# Altium PCB PCB1.PcbDoc (part 1 of 2)
Units mm, origin at the board's own origin, x right, y up, seen from the top; angles counter-clockwise.
Board outline 130 x 90 mm, 4 copper layers (Top Layer, GND, PWR, Bottom Layer), stack 1.506 mm thick; 78 components, 53 nets, 257 pads, 35 vias.
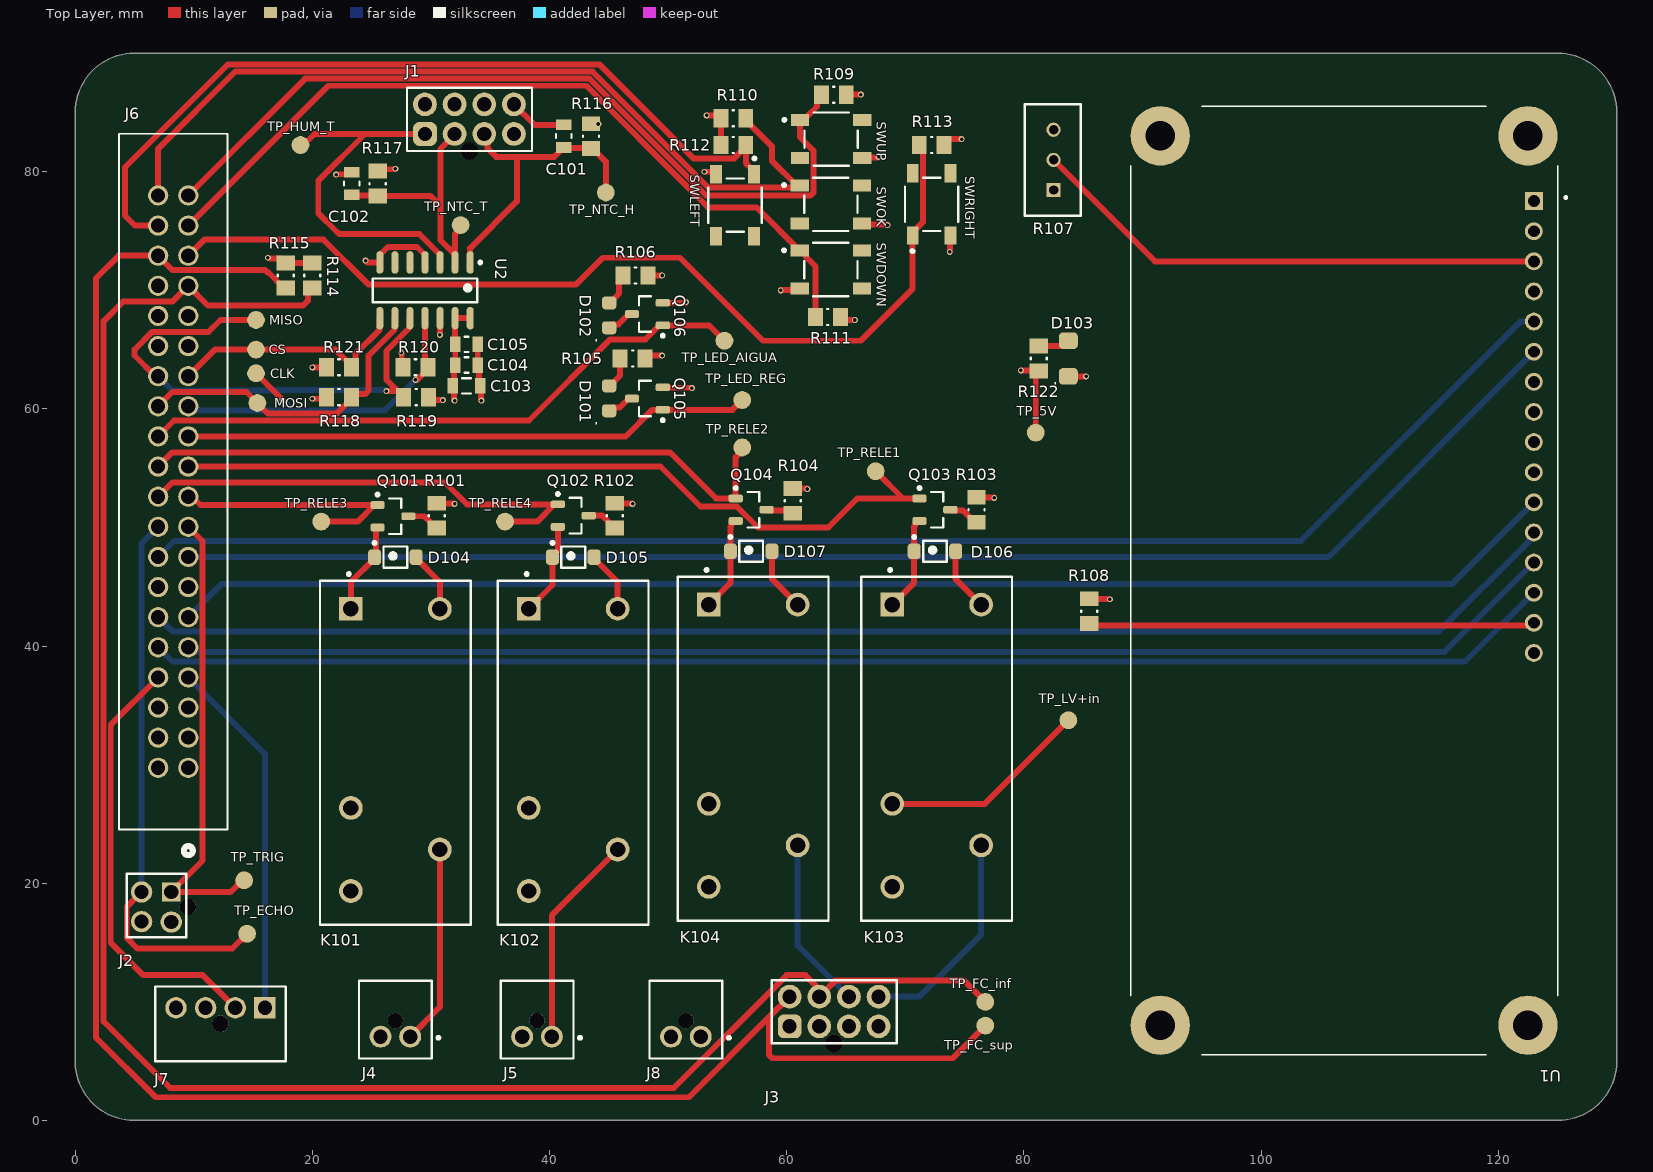
[diagram p0: Top Layer view]
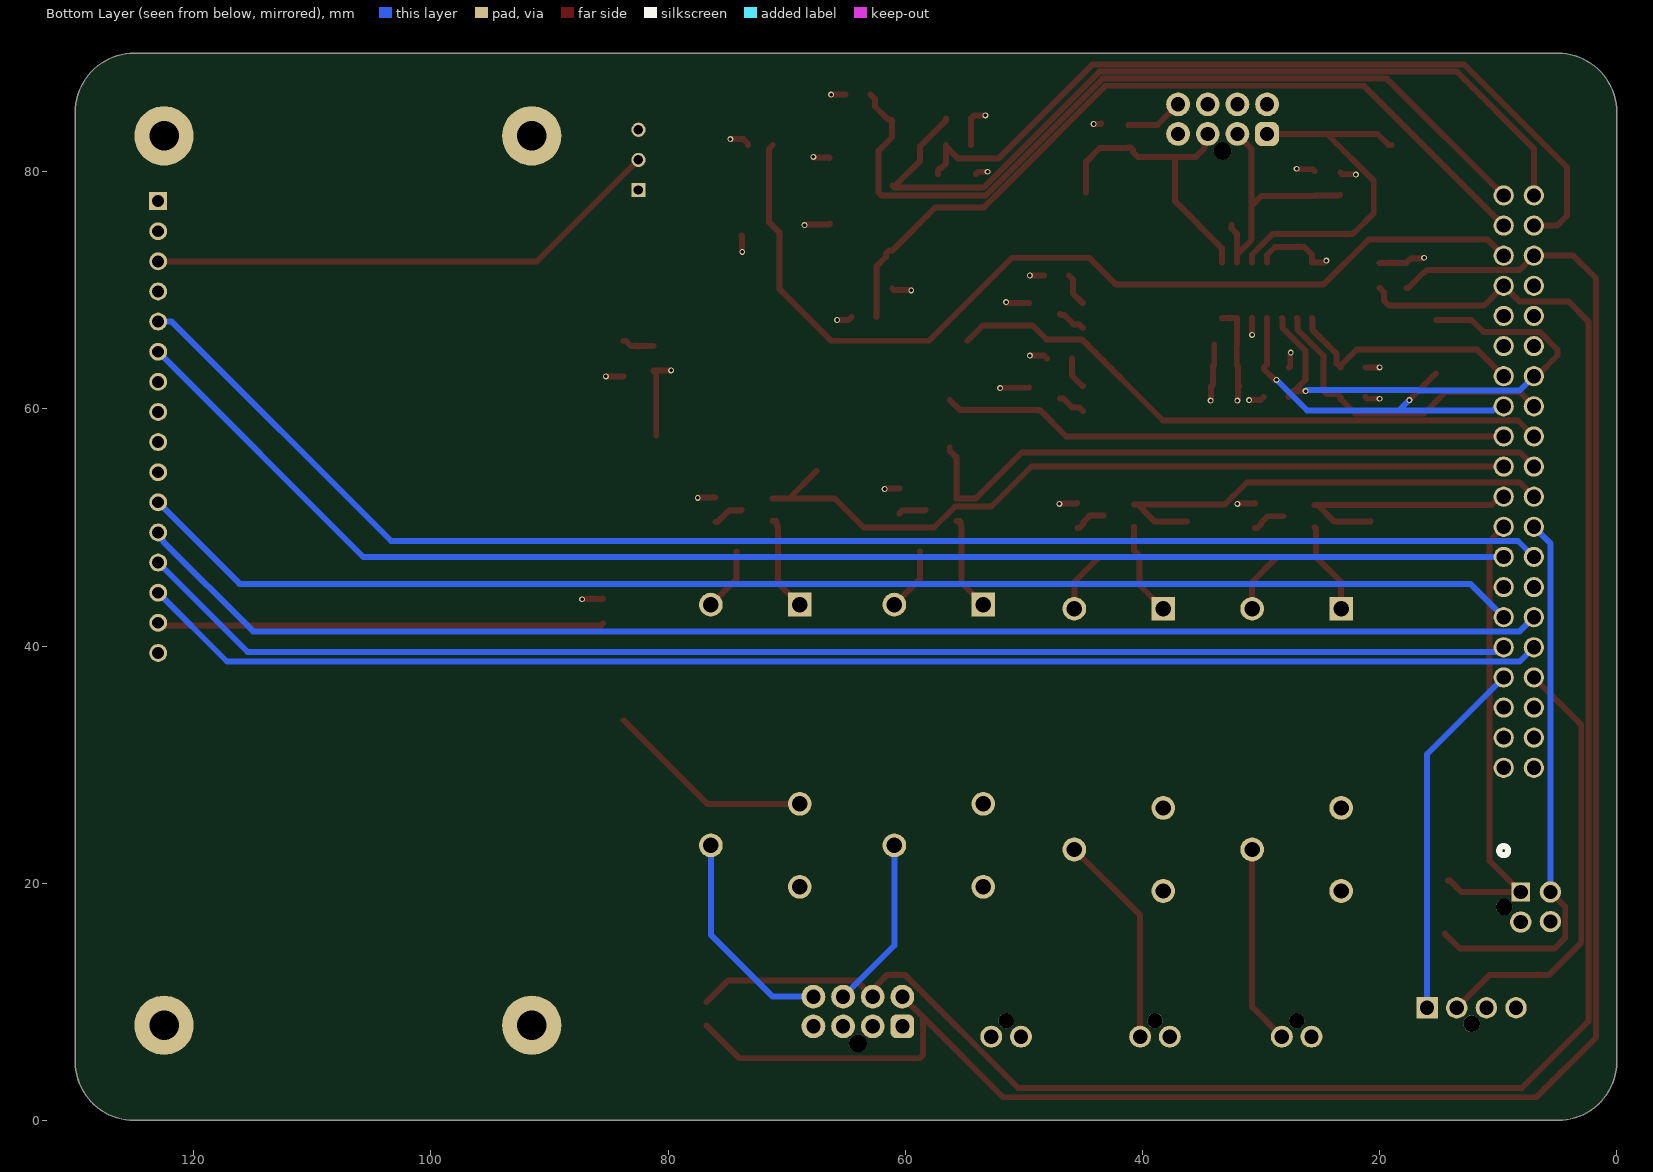
[diagram p1: Bottom Layer view, seen from below]
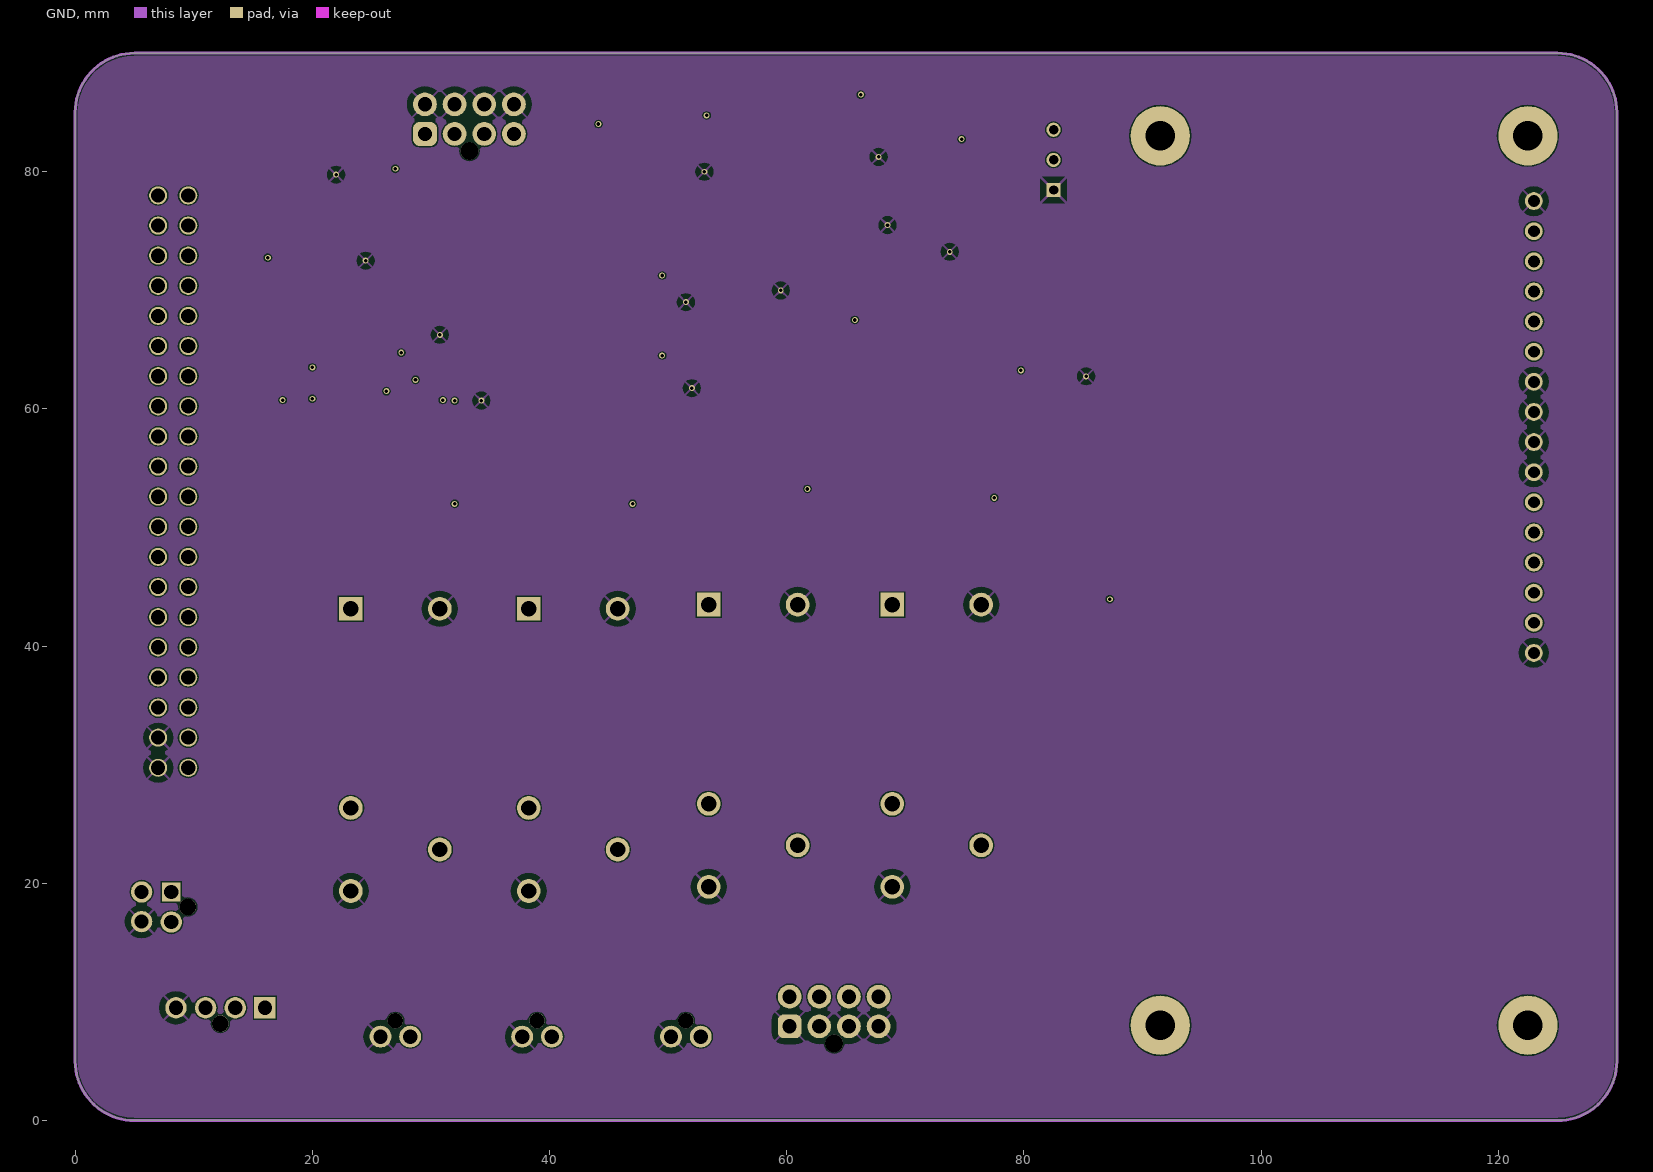
[diagram p2: GND]
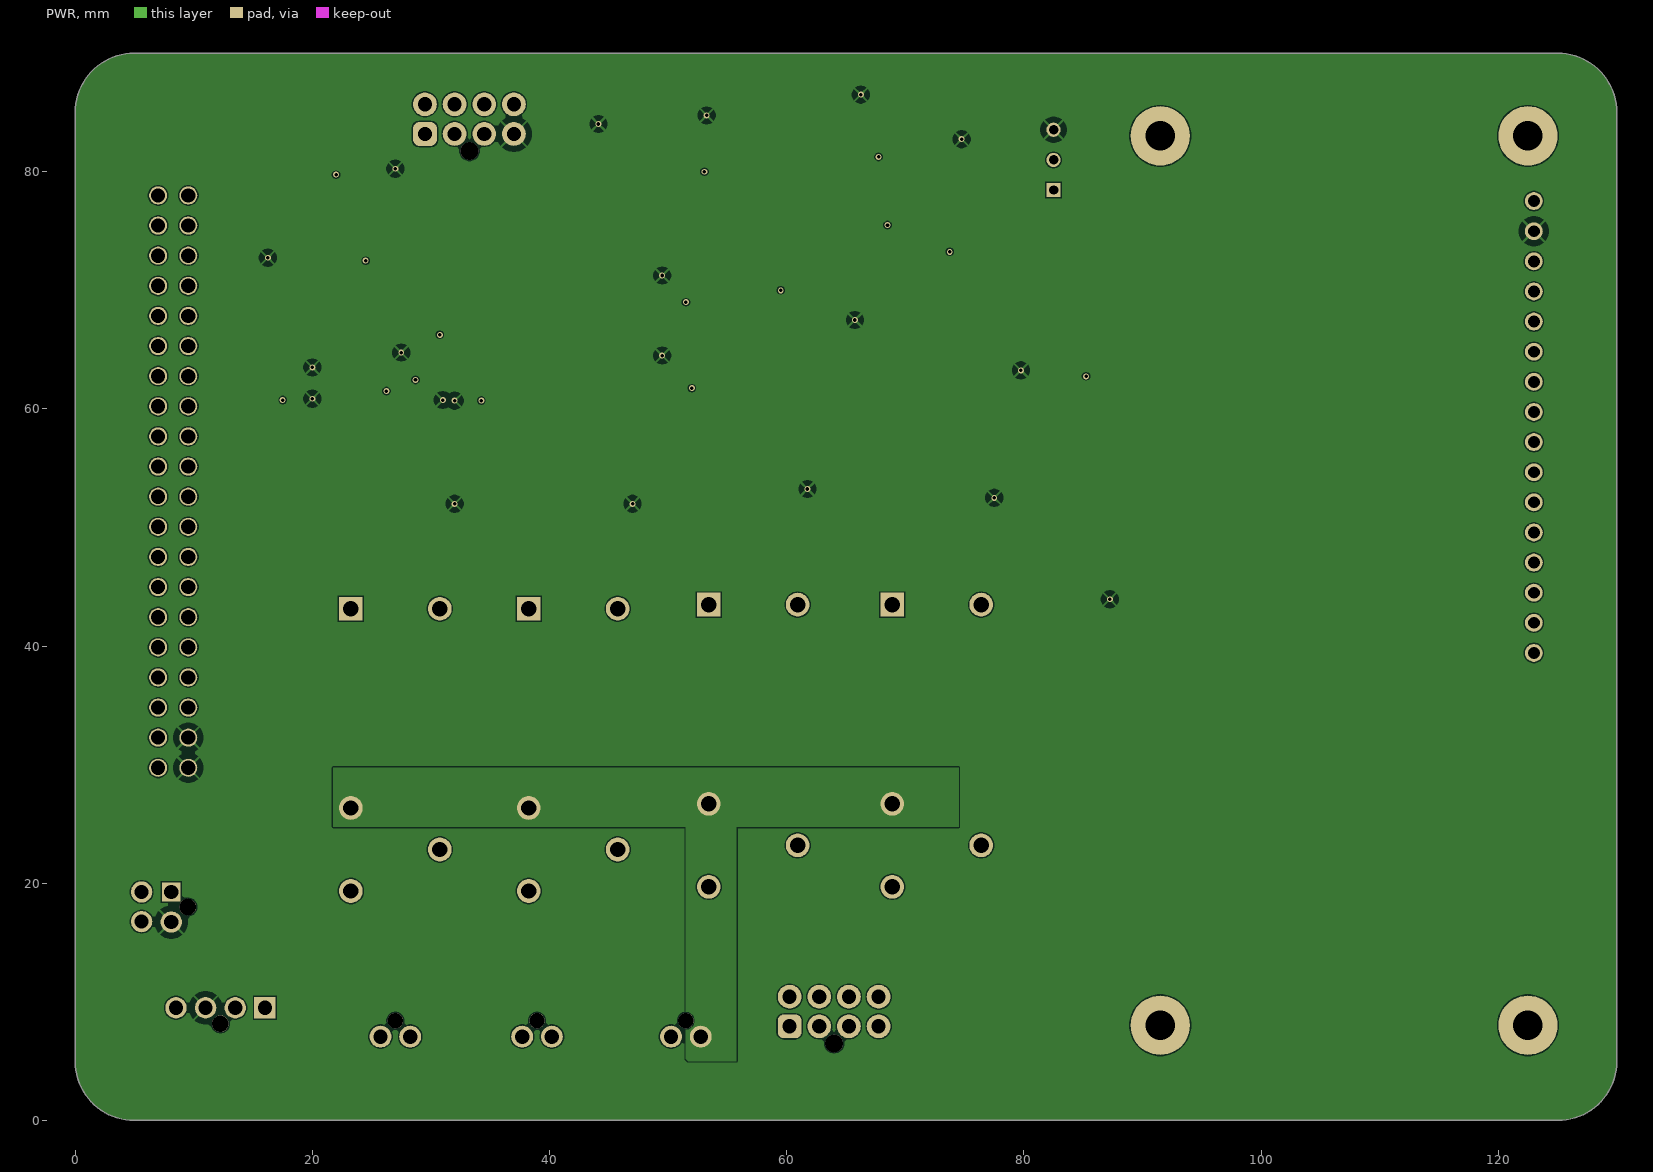
[diagram p3: PWR]
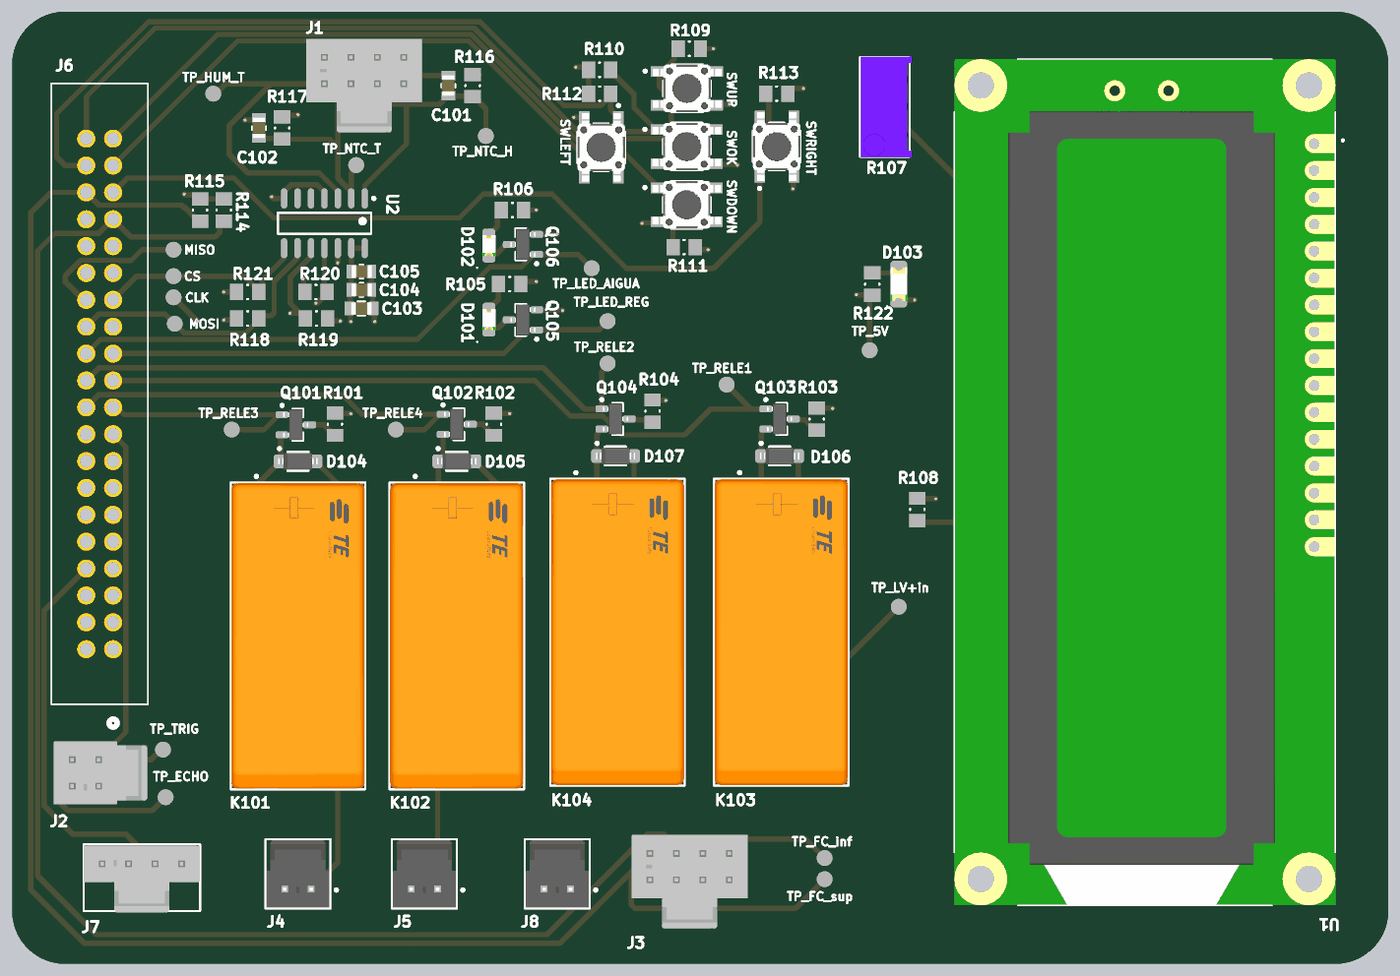
[diagram p4: 3D render of the assembled board from above, using the file's embedded part models]

## Layer stack, top to bottom
Top Solder: solder mask 0.01, Solder Resist, Dk 3.5
Top Layer: signal copper 0.035
Dielectric 2: prepreg 0.1, PP-006, Dk 4.1
GND: signal copper 0.018
Dielectric 4: prepreg 0.1, PP-006, Dk 4.1
Dielectric 1: dielectric 1, FR-4, Dk 4.8
Dielectric 5: prepreg 0.1, PP-006, Dk 4.1
PWR: signal copper 0.018
Dielectric 3: prepreg 0.1, PP-006, Dk 4.1
Bottom Layer: signal copper 0.035
Bottom Solder: solder mask 0.01, Solder Resist, Dk 3.5

## Board outline
0,5 0,85 cw(c5,85) 5,90 125,90 cw(c125,85) 130,85 130,5 cw(c125,5) 125,0 5,0 cw(c5,5)

## Design rules (kind name [scope] priority, off if disabled: settings)
AssemblyTestPointUsage [All] p1 off:
AssemblyTestpoint [All] p1 off: testpointundercomponent=TRUE minsize=1.016 maxsize=2.54 preferedsize=1.524 minholesize=0 maxholesize=1.016 preferedholesize=0.813 testpointgrid=0.025 usegrid=TRUE gridtolerance=0 allowsidetop=TRUE allowsidebottom=TRUE
Clearance [All] p1: gap=0.1 ignorepadtopadclearanceinfootprint=FALSE
ComponentClearance [All] p1: gap=0.2 collisioncheckmode=3 verticalgap=0.2 showdistances=FALSE
FabricationTestPointUsage [All] p1 off: valid=0 allowmultiple=FALSE
FabricationTestpoint [All] p1 off: side=3 testpointundercomponent=TRUE minsize=1.016 maxsize=2.54 preferedsize=1.524 minholesize=0 maxholesize=1.016 preferedholesize=0.813 testpointgrid=0.025 allowsidetop=TRUE allowsidebottom=TRUE usegrid=TRUE gridtolerance=0
HoleSize [All] p1: absolutevalues=TRUE maxlimit=5 minlimit=0.15 maxpercent=80.000 minpercent=20.000
PlaneClearance [All] p1: clearance=0.5
PlaneConnect [All] p1: planeconnectstyle=Relief reliefexpansion=0.5 reliefentries=4 reliefconductorwidth=0.2 reliefairgap=0.5
PolygonConnect [All] p1: connectstyle=Relief reliefconductorwidth=0.2 reliefentries=4 polygonreliefangle="45 Angle" airgapwidth=0.5
RoutingCorners [All] p1: cornerstyle=45-Degree minsetback=2.5 maxsetback=2.5
RoutingVias [All] p1: holewidth=0.3 width=0.7 viastyle="Through Hole" minholewidth=0.2 minwidth=0.5 maxholewidth=5 maxwidth=8
SolderMaskExpansion [All] p1: expansion=0.102 istentingtop=TRUE
SupplyNets "Schematic Supply Nets_2" [InNet('GND')] p1: voltage=0.000
SupplyNets "Schematic Supply Nets_1" [InNet('+5')] p2: voltage=0.000
SupplyNets "Schematic Supply Nets" [InNet('LV+in')] p3: voltage=0.000
UnRoutedNet [All] p1: checkbadconnections=TRUE
Width [All] p1: maxlimit=5 minlimit=0.2 preferedwidth=0.5 midlayer1_minwidth=0.254 midlayer2_minwidth=0.254 minimp=50.000000 maximp=50.000000 favimp=50.000000
20 further rules are at their usual default settings.

## Components (designator, comment, footprint, x,y, rotation, side; value= is the part's Value field where it differs from the comment)
C101 "C100n" C0805FNPC-R 41.2,83 r270 top value=100nF
C102 "C100n" C0805FNPC-R 23.324,79 r270 top value=100nF
C103 "C100p" C0805FNPC-W 33,61.95 r180 top value=100pF
C104 "C100n" C0805FNPC-R 33,63.7 r180 top value=100nF
C105 "C1u" C0805FNPC-R 33,65.45 r180 top value=1µF
CLK "TestPoint" TestPoint 15.25,63 r90 top
CS "TestPoint" TestPoint 15.25,65 r0 top
D101 "LEDYS-0805-120" LED_0805_WE 45.033,60.89 r90 top
D102 "LEDRS-0805-150" LED_0805_WE 45.033,67.89 r90 top
D103 "LEDGS-1206-450" LED_1206_WE 83.75,64.25 r90 top
D104 "DSC-0.5/30-SOD123" DSC-SOD123 27,47.5 r0 top
D105 "DSC-0.5/30-SOD123" DSC-SOD123 42,47.5 r0 top
D106 "DSC-0.5/30-SOD123" DSC-SOD123 72.5,48 r0 top
D107 "DSC-0.5/30-SOD123" DSC-SOD123 57,48 r0 top
J1 "J_NanoFit_2x4_V" J_NanoFit_2x4_V 33.246,83.719 r180 top
J2 "Molex_NanoFit_2x2" J_NanoFit_2x2_V 7.551,18 r270 top
J3 "J_NanoFit_2x4_V" J_NanoFit_2x4_V 63.996,8.468 r180 top
J4 "J_NanoFit_1x2" FP-105309-1102-MFG 27,8.5 r180 top
J5 "J_NanoFit_1x2" FP-105309-1102-MFG 38.947,8.5 r180 top
J6 "70246-4001" CONN_7024640xx_MOL 9.54,29.74 r90 top
J7 "J_NanoFit_1x4_V" J_NanoFit_1x4_V 12.25,9.5 r0 top
J8 "J_NanoFit_1x2" FP-105309-1102-MFG 51.5,8.5 r180 top
K101 "Relay_RZ01-1C4-D005" FP-1415899-7-MFG 27,31 r270 top
K102 "Relay_RZ01-1C4-D005" FP-1415899-7-MFG 42,31 r270 top
K103 "Relay_RZ01-1C4-D005" FP-1415899-7-MFG 72.65,31.35 r270 top
K104 "Relay_RZ01-1C4-D005" FP-1415899-7-MFG 57.175,31.35 r270 top
MISO "TestPoint" TestPoint 15.25,67.5 r90 top
MOSI "TestPoint" TestPoint 15.364,60.5 r90 top
Q101 "TRT-NPN" TRT-NPN-0.5/45-SOT23 26.8,50.95 r0 top
Q102 "TRT-NPN" TRT-NPN-0.5/45-SOT23 42,51 r0 top
Q103 "TRT-NPN" TRT-NPN-0.5/45-SOT23 72.5,51.5 r0 top
Q104 "TRT-NPN" TRT-NPN-0.5/45-SOT23 57,51.5 r0 top
Q105 "TRT-NPN" TRT-NPN-0.5/45-SOT23 48.25,60.875 r180 top
Q106 "TRT-NPN" TRT-NPN-0.5/45-SOT23 48.25,68 r180 top
R101 "R1K" 0805 30.5,51 r0 top value=1k
R102 "R1K" 0805 45.5,51 r0 top value=1k
R103 "R1K" 0805 76,51.5 r0 top value=1k
R104 "R1K" 0805 60.5,52.25 r0 top value=1k
R105 "R1K" 0805 47,64.25 r270 top value=1k
R106 "R1K" 0805 47.25,71.25 r270 top value=1k
R107 "R10k-VTR" R10k-VTR 82.5,81 r180 top value=10k
R108 "R1K" 0805 85.5,42.95 r0 top value=1k
R109 "R4K7" 0805 63.975,86.5 r270 top value=1k
R110 "R4K7" 0805 55.5,84.5 r90 top value=1k
R111 "R4K7" 0805 63.475,67.75 r270 top value=1k
R112 "R4K7" 0805 55.5,82.25 r90 top value=1k
R113 "R4K7" 0805 72.225,82.25 r270 top value=1k
R114 "R4K7" 0805 20,71.25 r0 top value=1k
R115 "R4K7" 0805 17.75,71.25 r0 top value=1k
R116 "R10K" 0805 43.5,83 r0 top value=1k
R117 "R10K" 0805 25.5,79 r0 top value=1k
R118 "R10K" 0805 22.25,61 r90 top value=1k
R119 "R10K" 0805 28.75,61 r270 top value=1k
R120 "R10K" 0805 28.7,63.5 r270 top value=1k
R121 "R10K" 0805 22.25,63.5 r270 top value=1k
R122 "R1K" 0805 81.25,64.25 r180 top value=1k
SWDOWN "tact_switch" FP-PTS647SK38SMTR2LFS-MFG 63.725,71.75 r0 top
SWLEFT "tact_switch" FP-PTS647SK38SMTR2LFS-MFG 55.65,77.175 r270 top
SWOK "tact_switch" FP-PTS647SK38SMTR2LFS-MFG 63.725,77.25 r0 top
SWRIGHT "tact_switch" FP-PTS647SK38SMTR2LFS-MFG 72.225,77.25 r90 top
SWUP "tact_switch" FP-PTS647SK38SMTR2LFS-MFG 63.75,82.75 r0 top
TP_5V "TestPoint" TestPoint 81,58 r90 top
TP_ECHO "TestPoint" TestPoint 14.5,15.75 r90 top
TP_FC_inf "TestPoint" TestPoint 76.75,10 r90 top
TP_FC_sup "TestPoint" TestPoint 76.75,8 r90 top
TP_HUM_T "TestPoint" TestPoint 19,82.25 r90 top
TP_LED_AIGUA "TestPoint" TestPoint 54.75,65.75 r90 top
TP_LED_REG "TestPoint" TestPoint 56.25,60.75 r90 top
TP_LV+in "TestPoint" TestPoint 83.75,33.75 r90 top
TP_NTC_H "TestPoint" TestPoint 44.75,78.25 r90 top
TP_NTC_T "TestPoint" TestPoint 32.5,75.5 r90 top
TP_RELE1 "TestPoint" TestPoint 67.5,54.75 r90 top
TP_RELE2 "TestPoint" TestPoint 56.25,56.75 r90 top
TP_RELE3 "TestPoint" TestPoint 20.75,50.5 r90 top
TP_RELE4 "TestPoint" TestPoint 36.25,50.5 r90 top
TP_TRIG "TestPoint" TestPoint 14.25,20.25 r90 top
U1 "LCD2X16" LCD_LCD2X16 107,45.525 r270 top
U2 "MCP3302-CI/SL" SOIC-SL14_L 29.5,70 r270 top

## Footprints (in the part's own frame and the unit in brackets; to place one, negate y for a bottom-side part, rotate by r counter-clockwise, add the part's x,y. Pads: shape width x height; smd on the part's side, far side on the other; paste and mask are expansions set on the pad)
0805 [mm] "Chip Resistor, 2-Leads, Body 2,60x1,50mm, IPC Medium Density"
  rect 1.55x1.25 smd: 1(0,-1.05) 2(0,1.05)
  silkscreen extent -0.67,-0.05 0.67,0.05, body extent -0.75,-1.3 0.75,1.3, height 0.6
C0805FNPC-R [mm]
  rect 0.9x1.3 smd: 1(-0.95,0) 2(0.95,0)
  silkscreen extent -0.15,-0.65 0.15,0.65, body extent -1.03,-0.63 0.97,0.63, height 0.96
C0805FNPC-W [mm]
  rect 0.9x1.3 smd: 1(-1.15,0) 2(1.15,0)
  silkscreen extent -0.35,-0.65 0.35,0.65, body extent -1,-0.63 1,0.63, height 0.96
CONN_7024640xx_MOL [mil]
  round 67 / inner round 60 / far side round 67 hole 47 mask+0: 1(0,0) 2(100,0) 3(200,0) 4(300,0) 5(400,0) 6(500,0) 7(600,0) 8(700,0) 9(800,0) 10(900,0) 11(1000,0) 12(1100,0) 13(1200,0) 14(1300,0) 15(1400,0) 16(1500,0) 17(1600,0) 18(1700,0) 19(1800,0) 20(1900,0) 21(0,100) 22(100,100) 23(200,100) 24(300,100) 25(400,100) 26(500,100) 27(600,100) 28(700,100) 29(800,100) 30(900,100) 31(1000,100) 32(1100,100) 33(1200,100) 34(1300,100) 35(1400,100) 36(1500,100) 37(1600,100) 38(1700,100) 39(1800,100) 40(1900,100)
  silkscreen extent -290,-130 2105,230
DSC-SOD123 [mm] "SOIC, 2-Leads, Body 1,60x2,69mm, Pitch 1,27mm, IPC Low Density"
  rrect50% 1.1x1.3 smd: A(1.75,0) K(-1.75,0)
  silkscreen extent -1.87,-0.9 1,1.32, body extent -1.86,-0.8 1.86,0.8, height 1.36
FP-105309-1102-MFG [mm]
  round 1.85 hole 1.2 mask+0: 1(-1.25,1.43) 2(1.25,1.43)
  round 1.3 hole 1.3 unplated mask+0: ""(0,0.09)
  silkscreen extent -3.75,-3.27 3.07,3.27, body extent -3.17,-3.37 3.17,3.37, height 0.25
FP-1415899-7-MFG [mm]
  round 2 hole 1.3 mask+0: 11(8.15,3.75) 12(4.65,-3.75) 14(11.65,-3.75) A2(-12.15,3.75)
  rect 2x2 hole 1.3 mask+0: A1(-12.15,-3.75)
  silkscreen extent -15.2,-6.35 14.5,6.35, body extent -14.6,-6.45 14.6,6.45, height 0.25
FP-PTS647SK38SMTR2LFS-MFG [mm]
  rect 1.55x1 smd mask+0: 1(-2.625,1.6) 2(2.625,1.6) 3(-2.625,-1.6) 4(2.625,-1.6)
  silkscreen extent -4.07,-2.25 2.25,2.25, body extent -3.5,-2.35 3.5,2.35, height 0.25
J_NanoFit_1x4_V [mm]
  round 1.4 hole 1.4: 0(0,-1.34)
  rect 1.8x1.8 hole 1.2: 1(3.75,0)
  round 1.8 hole 1.2: 2(1.25,0) 3(-1.25,0) 4(-3.75,0)
  silkscreen extent -5.5,-4.5 5.5,1.8, body extent -5.47,-4.65 5.47,1.69, height 10.68
J_NanoFit_2x2_V [mm]
  round 1.8 hole 1.2: 1(1.27,0.552) 2(1.23,-1.949) 4(-1.27,-1.949)
  rect 1.6x1.6 hole 1.2: 3(-1.27,0.552)
  round 1.4 hole 1.4: 5(0,1.949)
  silkscreen extent -2.79,-3.2 2.54,1.8, body extent -3.02,-3.61 2.92,5.23, height 9.92
J_NanoFit_2x4_V [mm]
  rrect50% 2x2 hole 1.2: 1(3.75,0.532)
  round 2 hole 1.2: 2(1.25,0.532) 3(-1.25,0.532) 4(-3.75,0.532) 5(3.75,-1.968) 6(1.25,-1.968) 7(-1.25,-1.968) 8(-3.75,-1.969)
  round 1.5 hole 1.5: 9(-0.004,1.968)
  silkscreen extent -5.27,-3.37 5.27,1.97, body extent -5.47,-3.71 5.47,5.13, height 9.92
LCD_LCD2X16 [mm]
  rect 1.508x1.508 / inner round 1.508 / far side rect 1.508x1.508 hole 1: 1(-32,16)
  round 1.508 hole 1: 2(-29.46,16) 3(-26.92,16) 4(-24.38,16) 5(-21.84,16) 6(-19.3,16) 7(-16.76,16) 8(-14.22,16) 9(-11.68,16) 10(-9.14,16) 11(-6.6,16) 12(-4.06,16) 13(-1.52,16) 14(1.02,16) 15(3.56,16) 16(6.1,16)
  round 5 hole 2.5: S1(-37.5,15.5) S2(37.5,15.5) S3(37.5,-15.5) S4(-37.5,-15.5)
  silkscreen extent -40,-18 40,18.8, body extent -40,-18 40,18, height 7
LED_0805_WE [mm] "SODFL, 2-Leads, Body 1,60x3,20mm, IPC Medium Density"
  rrect50% 1.1x1.2 smd: A(1.05,0) K(-1.05,0)
  silkscreen extent -2.15,1.05 -2.05,1.15, body extent -1,-0.62 1,0.63, height 0.7
LED_1206_WE [mm] "SODFL, 2-Leads, Body 1,60x3,20mm, IPC Medium Density"
  rrect50% 1.4x1.6 smd: A(1.5,0) K(-1.5,0)
  silkscreen extent -2.15,1.05 -2.05,1.15, body extent -1.6,-0.8 1.6,0.8, height 0.68
R10k-VTR [mm]
  rect 1.2x1.2 hole 0.8: 1(0,2.54)
  round 1.2 hole 0.8: 2(0,-2.54) 3(0,0)
  silkscreen extent -2.29,-4.7 2.41,4.7, body extent -2.49,-4.78 2.34,4.78, height 11.09
SOIC-SL14_L [mm] "SOIC, 14-Leads, Body 8.7x3.9mm, Pitch 1.27mm, IPC High Density"
  oval 1.9x0.6 smd: 1(-2.35,3.81) 2(-2.35,2.54) 3(-2.35,1.27) 4(-2.35,0) 5(-2.35,-1.27) 6(-2.35,-2.54) 7(-2.35,-3.81) 8(2.35,-3.81) 9(2.35,-2.54) 10(2.35,-1.27) 11(2.35,0) 12(2.35,1.27) 13(2.35,2.54) 14(2.35,3.81)
  silkscreen extent -2.47,-4.4 1,4.79, body extent -2,-4.38 2,4.38, height 1.75
TestPoint [mm]
  round 1.5 smd: 1(0,0)
TRT-NPN-0.5/45-SOT23 [mm] "SOT23, 3-Leads, Body 2,92x2,37mm, Pitch 0,95mm, IPC Low Density"
  rrect50% 1.2x0.65 smd: B(-1.3,0.95) C(1.3,0) E(-1.3,-0.95)
  silkscreen extent -1.42,-1.5 0.7,1.95, body extent -1.18,-1.46 1.19,1.46, height 1.12

## Part data
C101 C102 C104: library part CMP-00063-3, "Cap, 0.1ΜF, 50V, 10%, X7R, 0805", Case Code (Metric)=2012, Case/Package=0805, Dielectric=X7R, Manufacturer 1="Wurth Electronics", Manufacturer Part Number 1=885012207098, Max Operating Temperature=125°C, Min Operating Temperature=-55°C, Tolerance=10%, Voltage Rating=50V, .Creator=DR, Category="Ceramic Capacitors", ComponentLink1Description=http://www.farnell.com/datasheets/1958498.pdf?src-supplier=Farnell, ComponentLink1URL=http://www.farnell.com/datasheets/1958498.pdf?src-supplier=Farnell, ComponentLink2Description=http://www.farnell.com/datasheets/1958498.pdf?src-supplier=Element14, ComponentLink2URL=http://www.farnell.com/datasheets/1958498.pdf?src-supplier=Element14, ComponentLink3Description=https://katalog.we-online.de/pbs/datasheet/885012207098.pdf?src-supplier=Digi-Key, ComponentLink3URL=https://katalog.we-online.de/pbs/datasheet/885012207098.pdf?src-supplier=Digi-Key, ComponentLink4Description=http://www.farnell.com/datasheets/1958498.pdf?src-supplier=Newark, ComponentLink4URL=http://www.farnell.com/datasheets/1958498.pdf?src-supplier=Newark, Design Item ID=C100n-50V-0805FNPC-X7R, Length=0.079inch, Mount="Surface Mount", Packaging="Cut Tape", Pricing 1="100=0,10200, 500=0,07100, 2000=0,06100 (GBP)", REACH SVHC=Unknown, RoHS=Yes, RoHS Compliant=Yes, Source=Passives.SchLib, Stock 1=8000, Thickness=0.035inch, Voltage Rating (DC)=50V, Width=0.049inch
C103: library part CMP-00068-3, "Multilayer Ceramic Capacitor, Wcap-Csgp Series, 100 Pf, 5%, C0G / Np0, 50 V, 0805 [2012 Metric] Rohs Compliant: Yes", Case Code (Metric)=2012, Case/Package=0805, Dielectric=C0G, Manufacturer="Wurth Electronics", Manufacturer Part Number=885012007057, Max Operating Temperature=125°C, Min Operating Temperature=-55°C, Tolerance=5%, Voltage Rating=50V, .Creator=DR, Category="Ceramic Capacitors", ComponentLink1Description=http://www.farnell.com/datasheets/1958443.pdf?src-supplier=Farnell, ComponentLink1URL=http://www.farnell.com/datasheets/1958443.pdf?src-supplier=Farnell, ComponentLink2Description=https://katalog.we-online.de/pbs/datasheet/885012007057.pdf?src-supplier=Digi-Key, ComponentLink2URL=https://katalog.we-online.de/pbs/datasheet/885012007057.pdf?src-supplier=Digi-Key, ComponentLink3Description=http://www.farnell.com/datasheets/1958443.pdf?src-supplier=Element14, ComponentLink3URL=http://www.farnell.com/datasheets/1958443.pdf?src-supplier=Element14, ComponentLink4Description=http://www.farnell.com/datasheets/1958443.pdf?src-supplier=Newark, ComponentLink4URL=http://www.farnell.com/datasheets/1958443.pdf?src-supplier=Newark, ComponentLink5Description="Where buy it", ComponentLink5URL=https://www.we-online.com/catalog/en/WCAP-CSGP-50VDC#885012007057, Design Item ID=C100p-50V-0805FNPC-C0G/NP0, Length=0.079inch, Mount="Surface Mount", Packaging="Cut Tape", Pricing 1="4000=0,03900, 12000=0,03800 (USD)", REACH SVHC=Unknown, RoHS=Yes, RoHS Compliant=Yes, Source=Passives.SchLib, Stock 1=1, Thickness=0.035inch, Voltage Rating (DC)=50V, Width=0.049inch
C105: library part CMP-00052-2, "Multilayer Ceramic Capacitor, Wcap-Csgp Series, 1 F, 10%, X7R, 50 V, 0805 [2012 Metric] Rohs Compliant: Yes", Case Code (Metric)=2012, Case/Package=0805, Dielectric=X7R, Manufacturer 1="Wurth Electronics", Manufacturer Part Number 1=885012207103, Max Operating Temperature=85°C, Min Operating Temperature=-55°C, Tolerance=10%, Voltage Rating=50V, .Creator=GP, Category="Ceramic Capacitors", ComponentLink1Description=http://www.farnell.com/datasheets/1958501.pdf?src-supplier=Farnell, ComponentLink1URL=http://www.farnell.com/datasheets/1958501.pdf?src-supplier=Farnell, ComponentLink2Description=http://www.farnell.com/datasheets/1958501.pdf?src-supplier=Element14, ComponentLink2URL=http://www.farnell.com/datasheets/1958501.pdf?src-supplier=Element14, ComponentLink3Description=https://katalog.we-online.de/pbs/datasheet/885012107003.pdf?src-supplier=Digi-Key, ComponentLink3URL=https://katalog.we-online.de/pbs/datasheet/885012107003.pdf?src-supplier=Digi-Key, ComponentLink4Description=http://www.farnell.com/datasheets/1958501.pdf?src-supplier=Newark, ComponentLink4URL=http://www.farnell.com/datasheets/1958501.pdf?src-supplier=Newark, Design Item ID=C1u-50V-0805FNPC-X7R, Length=0.079inch, Mount="Surface Mount", Packaging="Cut Tape", Pricing 1="50=0,27200, 250=0,25300, 500=0,22800, 1250=0,20100, 2500=0,17100 (GBP)", REACH SVHC=Unknown, RoHS=Yes, RoHS Compliant=Yes, Source=Passives.SchLib, Stock 1=5100, Thickness=0.053inch, Voltage Rating (DC)=50V, Width=0.049inch
CLK CS MISO MOSI TP_5V TP_ECHO TP_FC_inf TP_FC_sup TP_HUM_T TP_LED_AIGUA TP_LED_REG TP_LV+in TP_NTC_H TP_NTC_T TP_RELE1 TP_RELE2 TP_RELE3 TP_RELE4 TP_TRIG: library part CMP-00042-2, "Test Point 1x1 mm", .Creator=GP, .PCBcheck=GP, .SCHcheck=GP, Category=TestPoint, Design Item ID=TestPoint, Source=e-Tech_Racing.SchLib
D101: library part CMP-00136-1, "2 V Yellow LED 2012 (0805) SMD, Wurth Elektronik WL-SMCW 150080YS75000", Case Code (Imperial)=0805, Case Code (Metric)=2012, Color=Yellow, Forward Current=30mA, Forward Voltage=2V, Manufacturer 1="Wurth Electronics", Manufacturer Part Number 1=150080YS75000, Max Operating Temperature=85°C, Min Operating Temperature=-40°C, Package Quantity=4000, Test Current=20mA, .Creator=DR, Case/Package=0805, Category=LEDs, ComponentLink1Description=Datasheet, ComponentLink1URL=https://www.we-online.com/catalog/datasheet/150080YS75000.pdf, ComponentLink2Description="Where buy it", ComponentLink2URL=https://katalog.we-online.de/en/led/WL-SMCW/150080YS75000, ComponentLink3Description=https://datasheet.ciiva.com/23843/150080ys75000-23843256.pdf?src-supplier=Newark, ComponentLink3URL=https://datasheet.ciiva.com/23843/150080ys75000-23843256.pdf?src-supplier=Newark, ComponentLink4Description=https://datasheet.ciiva.com/29279/759438-da-01-en-chipled-0805-w-kl-gelb-150080ys75000-29279034.pdf?src-supplier=Conrad, ComponentLink4URL=https://datasheet.ciiva.com/29279/759438-da-01-en-chipled-0805-w-kl-gelb-150080ys75000-29279034.pdf?src-supplier=Conrad, ComponentLink5Description=https://datasheet.ciiva.com/22656/1911353-22656971.pdf?src-supplier=Element14, ComponentLink5URL=https://datasheet.ciiva.com/22656/1911353-22656971.pdf?src-supplier=Element14, ComponentLink6Description=https://datasheet.ciiva.com/29563/150080ys75000-29563019.pdf?src-supplier=Digi-Key, ComponentLink6URL=https://datasheet.ciiva.com/29563/150080ys75000-29563019.pdf?src-supplier=Digi-Key, ComponentLink7Description=https://datasheet.ciiva.com/29563/150080ys75000-29563020.pdf?src-supplier=Digi-Key, ComponentLink7URL=https://datasheet.ciiva.com/29563/150080ys75000-29563020.pdf?src-supplier=Digi-Key, ComponentLink8Description=https://datasheet.ciiva.com/29563/150080ys75000-29563021.pdf?src-supplier=Digi-Key, ComponentLink8URL=https://datasheet.ciiva.com/29563/150080ys75000-29563021.pdf?src-supplier=Digi-Key, Design Item ID=LEDYS-0805-120, Dominant Wavelength=590nm, Height=0.7mm, Length=2mm, Lens Style=Clear,Rectangular, Luminous Intensity=120mcd, Mount="Surface Mount", Packaging="Tape and Reel", Pricing 1="50=0,19300, 500=0,12900, 750=0,12300, 1500=0,11700, 3000=0,11100 (USD)", REACH SVHC=Unknown, RoHS=Yes, RoHS Compliant=Yes, Source=Semiconductor.SchLib, Stock 1=2100, Viewing Angle=140°, Wavelength=590nm, Width=1.25mm
D102: library part CMP-00133-1, "0805(H=0.8mm) 红色 高亮 λD=625nm VF=2V IF=30mA PD=72mW", Case Code (Imperial)=0805, Case Code (Metric)=2012, Color=Red, Forward Current=30mA, Forward Voltage=2V, Manufacturer 1="Wurth Electronics", Manufacturer Part Number 1=150080RS75000, Max Operating Temperature=85°C, Min Operating Temperature=-40°C, Package Quantity=4000, Test Current=20mA, .Creator=DR, Case/Package=0805, Category=LEDs, ComponentLink1Description=Datasheet, ComponentLink1URL=https://www.we-online.com/catalog/datasheet/150080RS75000.pdf, ComponentLink2Description="Where buy it", ComponentLink2URL=https://katalog.we-online.de/en/led/WL-SMCW/150080RS75000, ComponentLink3Description=https://datasheet.ciiva.com/22656/150080rs75000-22656961.pdf?src-supplier=Element14, ComponentLink3URL=https://datasheet.ciiva.com/22656/150080rs75000-22656961.pdf?src-supplier=Element14, ComponentLink4Description=https://datasheet.ciiva.com/29279/759435-da-01-en-chipled-0805-w-kl-rot-150080rs75000-29279032.pdf?src-supplier=Conrad, ComponentLink4URL=https://datasheet.ciiva.com/29279/759435-da-01-en-chipled-0805-w-kl-rot-150080rs75000-29279032.pdf?src-supplier=Conrad, Design Item ID=LEDRS-0805-150, Dominant Wavelength=625nm, Height=0.7mm, Length=2mm, Lens Style=Clear,Rectangular, Luminous Intensity=150mcd, Mount="Surface Mount", Packaging="Tape and Reel", Pricing 1="50=0,19300, 500=0,12900, 1000=0,12300, 2000=0,11700, 4000=0,11100 (USD)", REACH SVHC=Unknown, RoHS=Yes, RoHS Compliant=Yes, Source=Semiconductor.SchLib, Stock 1=1, Viewing Angle=140°, Wavelength=625nm, Width=1.25mm
D103: library part CMP-00132-1, "Led, Green, 520 Nm, 3.2 V, 30 Ma, 450 Mcd Rohs Compliant: Yes", Case Code (Imperial)=1206, Case Code (Metric)=3216, Color=Green, Forward Current=30mA, Forward Voltage=3.2V, Manufacturer="Wurth Electronics", Manufacturer Part Number=150120GS75000, Max Operating Temperature=85°C, Min Operating Temperature=-40°C, Package Quantity=3000, Test Current=20mA, .Creator=GP, Case/Package=1206, Category=LEDs, ComponentLink1Description=https://datasheet.ciiva.com/22656/150120gs75000-22656979.pdf?src-supplier=Element14, ComponentLink1URL=https://datasheet.ciiva.com/22656/150120gs75000-22656979.pdf?src-supplier=Element14, ComponentLink2Description=https://datasheet.ciiva.com/29279/759441-da-01-en-chipled-1206-w-kl-gruen-150120gs75000-29279042.pdf?src-supplier=Conrad, ComponentLink2URL=https://datasheet.ciiva.com/29279/759441-da-01-en-chipled-1206-w-kl-gruen-150120gs75000-29279042.pdf?src-supplier=Conrad, ComponentLink3Description=https://datasheet.ciiva.com/48430/150120gs75000-eng-tds-48430053.pdf?src-supplier=Distrelec, ComponentLink3URL=https://datasheet.ciiva.com/48430/150120gs75000-eng-tds-48430053.pdf?src-supplier=Distrelec, ComponentLink4Description=https://datasheet.ciiva.com/29561/150120gs75000-29561883.pdf?src-supplier=Digi-Key, ComponentLink4URL=https://datasheet.ciiva.com/29561/150120gs75000-29561883.pdf?src-supplier=Digi-Key, ComponentLink5Description=https://datasheet.ciiva.com/29561/150120gs75000-29561884.pdf?src-supplier=Digi-Key, ComponentLink5URL=https://datasheet.ciiva.com/29561/150120gs75000-29561884.pdf?src-supplier=Digi-Key, ComponentLink6Description=https://datasheet.ciiva.com/29561/150120gs75000-29561885.pdf?src-supplier=Digi-Key, ComponentLink6URL=https://datasheet.ciiva.com/29561/150120gs75000-29561885.pdf?src-supplier=Digi-Key, ComponentLink7Description="Where buy it", ComponentLink7URL=https://www.we-online.com/catalog/en/WL-SMCW?sq=150120GS75000#150120GS75000, Design Item ID=LEDGS-1206-450, Dominant Wavelength=520nm, Height=0.68mm, Length=3.2mm, Lens Style=Clear,Rectangular, Luminous Intensity=450mcd, Mount="Surface Mount", Packaging="Tape and Reel", Pricing 1="50=0,23200, 500=0,16400, 750=0,15500, 1500=0,15000, 3000=0,14200 (USD)", REACH SVHC=Unknown, RoHS=Yes, RoHS Compliant=Yes, Source=Semiconductor.SchLib, Stock 1=1, Viewing Angle=140°, Wavelength=520nm, Width=1.6mm
D104 D105 D106 D107: library part CMP-00165-2, "VR=30V IF=500mA 30pF P=410mW", Average Rectified Current=500mA, Forward Voltage=430mV, Max Forward Surge Current (Ifsm)=5.5A, Max Repetitive Reverse Voltage (Vrrm)=30V, Max Reverse Current=130uA, Package Quantity=1, .Creator=GP, Category=Diode, ComponentLink1Description=Datasheet, ComponentLink2Description="Where buy it", ComponentLink3Description=https://datasheet.ciiva.com/30479/0900766b810e2512-30479401.pdf?src-supplier=RSComponents, ComponentLink3URL=https://datasheet.ciiva.com/30479/0900766b810e2512-30479401.pdf?src-supplier=RSComponents, ComponentLink4Description=https://datasheet.ciiva.com/34301/974753-34301826.pdf?src-supplier=Jameco, ComponentLink4URL=https://datasheet.ciiva.com/34301/974753-34301826.pdf?src-supplier=Jameco, ComponentLink5Description=https://datasheet.ciiva.com/910/mbr0530-910516.pdf?src-supplier=Digi-Key, ComponentLink5URL=https://datasheet.ciiva.com/910/mbr0530-910516.pdf?src-supplier=Digi-Key, ComponentLink6Description=https://datasheet.ciiva.com/25931/mbr0530-25931989.pdf?src-supplier=Avnet+Europe, ComponentLink6URL=https://datasheet.ciiva.com/25931/mbr0530-25931989.pdf?src-supplier=Avnet+Europe, ComponentLink7Description=https://datasheet.ciiva.com/8300/mbr0530-8300905.pdf?src-supplier=Avnet, ComponentLink7URL=https://datasheet.ciiva.com/8300/mbr0530-8300905.pdf?src-supplier=Avnet, ComponentLink8Description=https://datasheet.ciiva.com/17318/mbr0530-17318568.pdf?src-supplier=Future+Electronics, ComponentLink8URL=https://datasheet.ciiva.com/17318/mbr0530-17318568.pdf?src-supplier=Future+Electronics, ComponentLink9Description=https://datasheet.ciiva.com/15144/getdatasheetpartid-86760-15144598.pdf?src-supplier=Verical, ComponentLink9URL=https://datasheet.ciiva.com/15144/getdatasheetpartid-86760-15144598.pdf?src-supplier=Verical, ComponentLink10Description=https://datasheet.ciiva.com/910/mbr0530-910518.pdf?src-supplier=Digi-Key, ComponentLink10URL=https://datasheet.ciiva.com/910/mbr0530-910518.pdf?src-supplier=Digi-Key, Contact Plating=Tin,Matte, Current Rating=500mA, Design Item ID=DSC-0.5/30-SOD123, Element Configuration=Single, Forward Current=500mA, Height=1.03mm, Lead Free="Lead Free", Length=2.7mm, Max Reverse Leakage Current=130uA, Max Reverse Voltage (DC)=30V, Max Surge Current=5.5A, Mount="Surface Mount", Output Current=500mA, Peak Non-Repetitive Surge Current=5.5A, Polarity=Standard, Pricing 1="1=0,34400, 10=0,23900, 100=0,12200, 500=0,10000 (USD)", Radiation Hardening=No, REACH SVHC="No SVHC", RoHS Compliant=Yes, Series=-, Source="Filter components.SchLib", Stock 1=9, Voltage Rating (DC)=30V, Weight=0.03g, Width=1.6mm
J1 J3: library part CMP-00019-1, "Nano-Fit Conn Power HDR 8 POS 2.5mm Solder ST Thru-Hole 8 Terminal 1 Port Nano-Fit™ Frame", Manufacturer=Molex, Manufacturer Part Number=105310-1108, Category="Headers and Wire Housings", ComponentLink1Description=Datasheet, ComponentLink1URL=https://www.molex.com/pdm_docs/sd/1053101108_sd.pdf, ComponentLink2Description=https://www.molex.com/pdm_docs/ps/PS-105300-100-001.pdf?src-supplier=Digi-Key, ComponentLink2URL=https://www.molex.com/pdm_docs/ps/PS-105300-100-001.pdf?src-supplier=Digi-Key, ComponentLink3Description=http://www.farnell.com/datasheets/2551089.pdf?src-supplier=Newark, ComponentLink3URL=http://www.farnell.com/datasheets/2551089.pdf?src-supplier=Newark, ComponentLink4Description="Where buy it", ComponentLink4URL=https://www.molex.com/molex/products/part-detail/pcb_headers/1053101108, Design Item ID=J_NanoFit_2x4_V, Pricing 1="8=1,52500, 40=0,87900, 80=0,83600 (GBP)", RoHS=No, Source=Electromechanical.SchLib, Stock 1=1512
J2: library part CMP-00005-3, "Nano-Fit Vertical Header Through Hole 2.50mm Pitch Dual Row 4 Circuits Tin (Sn) Plating Black", Manufacturer=Molex, Manufacturer Part Number=1053141104, Maximum current="7.5 A", Maximum voltage="750 V AC", Temperature rating="-40° to +105°C", .Creator=GP, Application="Wire to board", Category=Connector, Category type="PCB header", ComponentLink1Description=Datasheet, ComponentLink1URL=https://www.molex.com/molex/products/part-detail/pcb_headers/1053141104, ComponentLink2Description="Where buy it", ComponentLink3Description=http://www.farnell.com/datasheets/2551094.pdf?src-supplier=Farnell, ComponentLink3URL=http://www.farnell.com/datasheets/2551094.pdf?src-supplier=Farnell, ComponentLink4Description=http://www.farnell.com/datasheets/2551094.pdf?src-supplier=Newark, ComponentLink4URL=http://www.farnell.com/datasheets/2551094.pdf?src-supplier=Newark, Connections=2x2, Design Item ID=J_Supply, Flammability=94V-0, Mount="Through hole", Orientation="Right Angle", Pricing 1="1=1,25000, 10=1,03600, 300=0,86330, 1200=0,69065, 5100=0,60432, 10200=0,57410 (USD)", Product name=Nano-Fit, Source=Electromechanical.SchLib, Stock 1=3160
J4 J5 J8: library part CMP-002-00001-2, "Conn HDR 2 POS 2.5mm Solder ST Thru-Hole 2 Terminal 1 Port Nano-Fit Tray"
J6: library part CMP-002-00559-1, "Board Connector, 40 Contact(s), 2 Row(s), Male, Straight, 0.1 inch Pitch, Solder Terminal, Guide Slot, Black Insulator, Receptacle", Max Operating Temperature=120°C, Min Operating Temperature=-55°C, Connector Type="BOARD CONNECTOR", Mounting Technology=Board, RoHS Compliant=Yes
J7: library part CMP-00018-1, "Nano-Fit Vertical Header Through Hole 2.50mm Pitch Single Row 4 Circuits with Kinked Pins 0.38", Manufacturer 1=Molex, Manufacturer Part Number 1=105309-1204, .Creator=DO, Category="Headers and Wire Housings", ComponentLink1Description=http://farnell.com//datasheets/2221349.pdf?src-supplier=Farnell, ComponentLink1URL=http://farnell.com//datasheets/2221349.pdf?src-supplier=Farnell, ComponentLink2Description=http://www.farnell.com/datasheets/2221349.pdf?src-supplier=Newark, ComponentLink2URL=http://www.farnell.com/datasheets/2221349.pdf?src-supplier=Newark, ComponentLink3Description=http://www.literature.molex.com/SQLImages/kelmscott/Molex/PDF_Images/987651-1223.PDF?src-supplier=Digi-Key, ComponentLink3URL=http://www.literature.molex.com/SQLImages/kelmscott/Molex/PDF_Images/987651-1223.PDF?src-supplier=Digi-Key, ComponentLink4Description=http://www.farnell.com/datasheets/2059602.pdf?src-supplier=Element14, ComponentLink4URL=http://www.farnell.com/datasheets/2059602.pdf?src-supplier=Element14, Design Item ID=J_NanoFit_1x4_V, Pricing 1="1=1,37050, 10=1,11700, 100=0,95270, 500=0,86980, 1000=0,74060, 2500=0,71930, 5000=0,68450, 10000=0,66860 (USD)", RoHS=No, Source=Electromechanical.SchLib, Stock 1=709
K101 K102 K103 K104: library part CMP-00028-00000-1, "Power/Signal Relay, SPDT, Momentary, 0.084A (Coil), 5VDC (Coil), 420mW (Coil), DC Input, AC Output, Through Hole-Straight Mount. 1415899-7. RZ01-1C4-D005", Max Operating Temperature=85°C, Min Operating Temperature=-40°C, Mounting Technology="Through Hole", RoHS Compliant=Yes
Q101 Q102 Q103 Q104 Q105 Q106: library part CMP-00148-1, "ON Semi BC817-25LT1G NPN Bipolar Transistor; 0.5 A; 45 V; 3-Pin SOT-23", Case/Package=SOT-23-3, Collector Base Voltage (VCBO)=50V, Collector Emitter Breakdown Voltage=45V, Collector Emitter Saturation Voltage=700mV, Current Rating=500mA, Emitter Base Voltage (VEBO)=5V, Frequency=100MHz, Package Quantity=1, Power Dissipation=300mW, .Creator=GP, Category=Transistor, Collector Emitter Voltage (VCEO)=45V, Collector-emitter Voltage-Max=700mV, ComponentLink1Description=Datasheet, ComponentLink2Description="Where buy it", ComponentLink3Description=https://datasheet.ciiva.com/27748/2010413-27748829.pdf?src-supplier=Jameco, ComponentLink3URL=https://datasheet.ciiva.com/27748/2010413-27748829.pdf?src-supplier=Jameco, ComponentLink4Description=https://datasheet.ciiva.com/15138/getdatasheetpartid-38405-15138602.pdf?src-supplier=Verical, ComponentLink4URL=https://datasheet.ciiva.com/15138/getdatasheetpartid-38405-15138602.pdf?src-supplier=Verical, ComponentLink5Description=https://datasheet.ciiva.com/1196/bc817-16lt1-d-1196558.pdf?src-supplier=Element14, ComponentLink5URL=https://datasheet.ciiva.com/1196/bc817-16lt1-d-1196558.pdf?src-supplier=Element14, ComponentLink6Description=https://datasheet.ciiva.com/22641/bc817-16lt1-d-22641013.pdf?src-supplier=Farnell, ComponentLink6URL=https://datasheet.ciiva.com/22641/bc817-16lt1-d-22641013.pdf?src-supplier=Farnell, ComponentLink7Description=https://datasheet.ciiva.com/22664/bc817-16lt1-d-22664204.pdf?src-supplier=Element14, ComponentLink7URL=https://datasheet.ciiva.com/22664/bc817-16lt1-d-22664204.pdf?src-supplier=Element14, ComponentLink8Description=https://datasheet.ciiva.com/22664/1842041-22664101.pdf?src-supplier=Element14, ComponentLink8URL=https://datasheet.ciiva.com/22664/1842041-22664101.pdf?src-supplier=Element14, ComponentLink9Description=https://datasheet.ciiva.com/4722/bc817-16lt1-d-104560-4722229.pdf?src-supplier=Mouser, ComponentLink9URL=https://datasheet.ciiva.com/4722/bc817-16lt1-d-104560-4722229.pdf?src-supplier=Mouser, ComponentLink10Description=https://datasheet.ciiva.com/1195/bc817-16lt1-d-1195763.pdf?src-supplier=Element14, ComponentLink10URL=https://datasheet.ciiva.com/1195/bc817-16lt1-d-1195763.pdf?src-supplier=Element14, ComponentLink11Description=https://datasheet.ciiva.com/1195/bc817-16lt1-d-1195764.pdf?src-supplier=Element14, ComponentLink11URL=https://datasheet.ciiva.com/1195/bc817-16lt1-d-1195764.pdf?src-supplier=Element14, ComponentLink12Description=https://datasheet.ciiva.com/11197/bc817-16lt1-d-11197514.pdf?src-supplier=Avnet, ComponentLink12URL=https://datasheet.ciiva.com/11197/bc817-16lt1-d-11197514.pdf?src-supplier=Avnet, ComponentLink13Description=https://datasheet.ciiva.com/25996/bc817-16lt1-d-25996327.pdf?src-supplier=Avnet+Europe, ComponentLink13URL=https://datasheet.ciiva.com/25996/bc817-16lt1-d-25996327.pdf?src-supplier=Avnet+Europe, ComponentLink14Description=https://datasheet.ciiva.com/976/bc817-16lt1-d-976357.pdf?src-supplier=Digi-Key, ComponentLink14URL=https://datasheet.ciiva.com/976/bc817-16lt1-d-976357.pdf?src-supplier=Digi-Key, ComponentLink15Description=https://datasheet.ciiva.com/976/bc817-16lt1-d-976358.pdf?src-supplier=Digi-Key, ComponentLink15URL=https://datasheet.ciiva.com/976/bc817-16lt1-d-976358.pdf?src-supplier=Digi-Key, ComponentLink16Description=https://datasheet.ciiva.com/976/bc817-16lt1-d-976356.pdf?src-supplier=Digi-Key, ComponentLink16URL=https://datasheet.ciiva.com/976/bc817-16lt1-d-976356.pdf?src-supplier=Digi-Key, Contact Plating=Tin,Matte, Design Item ID=TRT-NPN-0.5/45-SOT23, Element Configuration=Single, Gain Bandwidth Product=100MHz, Halogen Free="Halogen Free", Height=0.94mm, hFE Min=160, Lead Free="Lead Free", Length=2.9mm, Max Breakdown Voltage=45V, Max Collector Current=500mA, Max Frequency=100MHz, Number of Elements=1, Number of Pins=3, Pricing 1="1=0,20000, 10=0,18500, 100=0,10080, 500=0,06204, 1000=0,04229 (USD)", Radiation Hardening=No, REACH SVHC="No SVHC", RoHS Compliant=Yes, Series=-, Source=Semiconductor.SchLib, Transition Frequency=100MHz, Width=1.3mm
R101 R102 R103 R104 R105 R106 R108 R109 R110 R111 R112 R113 R114 R115 R116 R117 R118 R119 R120 R121 R122: library part CMP-009-00019-6, "Fixed Resistor, Thin Film, 0.125W, 1000ohm, 150V, 0.1% +/-Tol, 15ppm/Cel, Surface Mount, 0805", Case/Package=0805, Max Operating Temperature=125°C, Min Operating Temperature=-55°C, Power=125mW, Tolerance=0.1%, Mounting Technology="Surface Mount", Pins=2, RoHS Compliant=Yes
R107: library part CMP-00072-1, "Trimmer, Cermet, Rest 10 Kilohms, PCB, 25 Turns, Pwr-Rtg 0.5W, 3296 Series", Color=Blue, Insulation Resistance=1GR, Manufacturer=Bourns, Manufacturer Part Number=3296W-1-103LF, Max Operating Temperature=125°C, Max Power Dissipation=500mW, Min Operating Temperature=-55°C, Package Quantity=50, Resistance Tolerance=10%, Resistor Type=Cermet, Temperature Coefficient=100ppm/°C, .Creator=DO, Category="Variable Resistors and Potentiometers", ComponentLink1Description=https://datasheet.ciiva.com/19454/853572-19454866.pdf?src-supplier=Jameco, ComponentLink1URL=https://datasheet.ciiva.com/19454/853572-19454866.pdf?src-supplier=Jameco, ComponentLink2Description=https://datasheet.ciiva.com/11830/0900766b8069ccf4-11830871.pdf?src-supplier=RSComponents, ComponentLink2URL=https://datasheet.ciiva.com/11830/0900766b8069ccf4-11830871.pdf?src-supplier=RSComponents, ComponentLink3Description=https://datasheet.ciiva.com/29122/447277-da-01-en-trimmer-tht3296w-1-103lf-10k-0-5w-29122362.pdf?src-supplier=Conrad, ComponentLink3URL=https://datasheet.ciiva.com/29122/447277-da-01-en-trimmer-tht3296w-1-103lf-10k-0-5w-29122362.pdf?src-supplier=Conrad, ComponentLink4Description=https://datasheet.ciiva.com/26913/3296w-1-103lf-26913885.pdf?src-supplier=IIIC, ComponentLink4URL=https://datasheet.ciiva.com/26913/3296w-1-103lf-26913885.pdf?src-supplier=IIIC, ComponentLink5Description=https://datasheet.ciiva.com/1131/1815117-1131273.pdf?src-supplier=Element14, ComponentLink5URL=https://datasheet.ciiva.com/1131/1815117-1131273.pdf?src-supplier=Element14, ComponentLink6Description=https://datasheet.ciiva.com/18411/70153578-18411561.pdf?src-supplier=Allied+Electronics, ComponentLink6URL=https://datasheet.ciiva.com/18411/70153578-18411561.pdf?src-supplier=Allied+Electronics, ComponentLink7Description=https://datasheet.ciiva.com/3266/3296-3266187.pdf?src-supplier=Avnet, ComponentLink7URL=https://datasheet.ciiva.com/3266/3296-3266187.pdf?src-supplier=Avnet, ComponentLink8Description=https://datasheet.ciiva.com/30093/3296-30093899.pdf?src-supplier=Onlinecomponents.com, ComponentLink8URL=https://datasheet.ciiva.com/30093/3296-30093899.pdf?src-supplier=Onlinecomponents.com, ComponentLink9Description=https://datasheet.ciiva.com/2156/3296-2156893.pdf?src-supplier=Digi-Key, ComponentLink9URL=https://datasheet.ciiva.com/2156/3296-2156893.pdf?src-supplier=Digi-Key, ComponentLink10Description=https://datasheet.ciiva.com/14173/ew3296-dat-e-14173022.pdf?src-supplier=Distrelec, ComponentLink10URL=https://datasheet.ciiva.com/14173/ew3296-dat-e-14173022.pdf?src-supplier=Distrelec, ComponentLink11Description="Where buy it", ComponentLink11URL=https://es.rs-online.com/web/p/potenciometros-de-ajuste/5219647, Contact Plating=Tin,Matte, Depth=4.83mm, Design Item ID=R10k-VTR, Height=0.395inch, Lead Free="Lead Free", Length=9.53mm, Military Standard=Not, Mount="PCB,Through Hole", Number of Turns=25, Packaging=Rail/Tube, Power rating=500mW, Pricing 1="50=2,54800, 100=2,31900, 200=2,14000, 300=1,88400, 500=1,55300 (USD)", Radiation Hardening=No, REACH SVHC="No SVHC", RoHS=Yes, RoHS Compliant=Yes, Series=3296, Source=Passives.SchLib, Stock 1=3300, Taper=Linear, Technology=CERMET, Termination=Pin, Tolerance=10%, Weight=0.03oz, Width=9.53mm
SWDOWN SWLEFT SWOK SWRIGHT SWUP: library part CMP-00028-00009-1, "Keypad Switch, 1 Switches, SPST, Momentary-tactile, 0.05A, 12VDC, 2.94N, Solder Terminal, Surface Mount-straight", RoHS Compliant=Yes
U1: library part CMP-179-000000-1, "Display; Display: LCD 2x16 characters (blue backlight)", Package="TQFP-64 mikroElektronika", Check_prices=https://www.snapeda.com/parts/LCD%202X16/mikroElektronika/view-part/?ref=eda, Component Type=Standard, Design Item ID=LCD2X16, MF=mikroElektronika, MP="LCD 2X16", Pin Count=16, SnapEDA_Link=https://www.snapeda.com/parts/LCD%202X16/mikroElektronika/view-part/?ref=snap, Source=LCD2X16.SchLib
U2: library part CMP-031-00009-1, "ADC, Successive Approximation, 13-Bit, 1 Func, 4 Channel, Serial Access, PDSO14", Case/Package=SOP, Max Operating Temperature=85°C, Min Operating Temperature=-40°C, Pins=14, RoHS Compliant=Yes

## Via types
v1: diameter 0.5, hole 0.3, Top Layer to Bottom Layer, tented both sides, 35 vias

## Nets (pads, with @x,y where several pads share a name; then routed paths per layer and width w, separated by ;. In a path a pad name is that pad's centre, name@x,y a point inside that pad or via, vN(x,y) a via of type N, cw(c..) or ccw(c..) an arc to the next point about the centre after c; other vN are vias at no path point)
+5: C103.2 C104.2 C105.2 J1.4 J2.1 J6.1 J6.2 J7.3 R101.2 R102.2 R103.2 R104.2 R105.2 R106.2 R107.2 R108.2 R109.2 R110.2 R111.2 R112.2 R113.2 R114.2 R115.2 R116.2 R117.2 R118.2 R119.2 R120.1 R121.1 R122.2 TP_5V.1 U1.2 U2.13 U2.14 | length 45.1
  Top Layer w0.5: v1(16.25,72.75) 16.304,72.75 16.379,72.675 17.375,72.675 R115.2 R114.2 ; v1(20,60.859) 21.059,60.859 R118.2 ; v1(20,63.5) R121.1 ; R117.2 25.662,80.212 26.962,80.212 v1(27,80.25) ; v1(27.5,64.75) 27.538,64.712 27.538,63.612 R120.1 ; R119.2 30.05,60.75 v1(31,60.75) ; R101.2 30.525,52.025 31.975,52.025 v1(32,52) ; v1(32,60.7) 31.962,60.738 31.962,61.838 C103.2 31.95,62.05 31.95,63.6 C104.2 C105.2 ; C105.2@32.05,65.65 C105.2 ; U2.14 U2.13 32.045,67.645 32.045,65.455 C105.2 ; R116.2 43.525,84.025 v1(44.126,84.025) ; R102.2 45.525,52.025 46.975,52.025 v1(47,52) ; R105.2 48.3,64.5 v1(49.5,64.5) ; R106.2 v1(49.5,71.25) ; v1(53.25,84.75) 54.2,84.75 R110.2 R112.2 ; R104.2 60.525,53.275 61.725,53.275 v1(61.75,53.25) ; R111.2 64.775,67.5 v1(65.75,67.5) ; R109.2 v1(66.25,86.5) ; R113.2 73.275,82.375 73.65,82.75 v1(74.75,82.75) ; R103.2 76.025,52.525 77.475,52.525 v1(77.5,52.5) ; v1(79.75,63.25) 79.775,63.225 81.225,63.225 R122.2 81,62.95 TP_5V.1 TP_5V.1@81,57.75 ; R108.2 85.525,43.975 87.225,43.975 v1(87.25,43.95)
Bomba: J5.1 K102.11 | length 18.1
  Top Layer w0.5: J5.1 40.197,17.297 K102.11
CLK: CLK.1 J6.13 R120.2 U2.11 | length 30.6
  Top Layer w0.5: CLK.1 v1(17.5,60.75) ; v1(28.7,62.45) 28.738,62.488 28.888,62.488 29.75,63.35 R120.2 29.5,63.75 U2.11
  Bottom Layer w0.5: J6.13 9.77,59.99 10.319,59.99 10.434,59.875 18.375,59.875 ; v1(17.5,60.75) 18.375,59.875 ; v1(28.7,62.45) 26.125,59.875 18.375,59.875
CS: CS.1 J6.14 R121.2 U2.8 | length 20.5
  Top Layer w0.5: J6.14 11.78,65 CS.1 21.95,65 23.3,63.65 R121.2 23.63,63.83 23.63,64.63 25.671,66.671 25.671,67.631 U2.8
DOWN: J6.19 R111.1 SWDOWN.1 | length 68.2
  Top Layer w0.5: J6.19 21.33,87.25 43.12,87.25 51.833,78.537 53.37,77 57.45,77 SWDOWN.1 ; SWDOWN.1@61.375,73.35 61.625,73.1 61.625,72.825 62.425,72.025 R111.1
ECHO: J2.4 J6.29 TP_ECHO.1 | length 46.8
  Top Layer w0.5: J2.4 4.353,18.02 4.353,15.397 5.25,14.5 13.25,14.5 TP_ECHO.1
  Bottom Layer w0.5: J2.4 5.603,48.663 J6.29
FC_Inf: J3.6 J6.17 R114.1 TP_FC_inf.1 | length 162.6
  Top Layer w0.5: R114.1 19.995,70.2 19.62,69.825 19.62,69.12 19.225,68.725 11.195,68.725 J6.17 8.201,69.041 4.041,69.041 2.4,67.4 2.4,8.35 8,2.75 50.5,2.75 60,12.25 61.573,12.25 62.459,11.363 62.459,10.724 J3.6 64.096,11.787 74.963,11.787 TP_FC_inf.1
FC_Sup: J3.5 J6.38 R115.1 TP_FC_sup.1 | length 168.7
  Top Layer w0.5: R115.1 17.6,70.2 16.299,71.501 16.237,71.501 16.018,71.719 8.201,71.719 J6.38 3.67,72.92 1.75,71 1.75,7 6.793,1.957 51.767,1.957 58.5,8.691 ; J3.5 58.5,8.691 ; TP_FC_sup.1 74,5.25 58.793,5.25 58.5,5.543 58.5,8.691
GND: C101.1 C102.1 C103.1 C104.1 C105.1 D103.K D104.A D105.A D106.A D107.A J1.5 J1.6 J1.7 J1.8 J2.2 J3.1 J3.2 J3.3 J3.4 J4.2 J5.2 J6.21 J6.22 J7.4 J8.2 K101.14 K101.A2 K102.14 K102.A2 K103.14 K103.A2 K104.14 K104.A2 Q105.E Q106.E R107.1 SWDOWN.3 SWLEFT.3 SWOK.4 SWRIGHT.3 SWUP.4 U1.1 U1.7 U1.8 U1.9 U1.10 U1.16 U2.4 U2.7 U2.12 | length 54.4
  Top Layer w0.5: v1(22,79.75) 22.038,79.788 23.163,79.788 C102.1 ; v1(24.5,72.5) 24.65,72.35 U2.7 25.69,72.973 26.367,73.65 28.823,73.65 29.5,72.973 U2.4 ; D104.A 28.75,47.4 30.75,45.4 K101.A2 ; v1(30.75,66.25) 30.76,66.26 30.76,67.64 U2.12 ; C105.1 C104.1 34.05,63.6 34.05,62.05 C103.1 34.212,61.888 34.212,60.738 v1(34.25,60.7) ; J1.8 38.734,83.95 C101.1 ; D105.A 43.75,47.4 45.75,45.4 K102.A2 ; Q105.E 49.587,61.787 51.963,61.787 v1(52,61.75) ; Q106.E 51.45,68.95 v1(51.5,69) ; v1(53.057,80) 53.85,80 SWLEFT.3 ; D107.A 58.75,45.675 K104.A2 ; v1(59.5,70) 59.538,70.038 60.988,70.038 SWDOWN.3 ; SWOK.4 66.462,75.538 68.462,75.538 v1(68.5,75.5) ; SWUP.4 66.437,81.212 67.712,81.212 v1(67.75,81.25) ; v1(73.75,73.25) 73.788,73.288 73.788,74.587 SWRIGHT.3 ; D106.A 74.25,45.65 K103.A2 ; D103.K v1(85.25,62.75)
HUM_T: J1.1 TP_HUM_T.1 U2.3 | length 31.6
  Top Layer w0.5: TP_HUM_T.1 19.247,82.25 20.184,83.187 24.447,83.187 ; J1.1 24.447,83.187 ; U2.3 30.77,73 29.02,74.75 22.293,74.75 22.168,74.875 22.125,74.875 20.5,76.5 20.5,79.24 24.447,83.187
LCD_0: J6.8 U1.6 | length 120.6
  Bottom Layer w0.5: J6.8@9.547,47.52 105.695,47.52 U1.6
LCD_1: J6.28 U1.5 | length 124.2
  Bottom Layer w0.5: J6.28 8.339,48.859 103.359,48.859 121.865,67.365 U1.5
LCD_2: U1.4
LCD_4: J6.6 U1.11 | length 117.5
  Bottom Layer w0.5: J6.6 12.35,45.25 116.125,45.25 U1.11
LCD_5: J6.26 U1.12 | length 120.2
  Bottom Layer w0.5: J6.26 8.201,41.239 114.989,41.239 122.604,48.854 122.604,48.916 123,49.312 U1.12
LCD_6: J6.5 U1.13 | length 116.8
  Bottom Layer w0.5: J6.5 9.865,39.9 10.265,39.5 115.455,39.5 U1.13
LCD_7: J6.25 U1.14 | length 118.9
  Bottom Layer w0.5: J6.25 8.201,38.699 117.194,38.699 U1.14
LED_FALTA_AIGUA: J6.32 Q106.B TP_LED_AIGUA.1 | length 52.2
  Top Layer w0.5: J6.32 8.339,59.019 38.269,59.019 45.115,65.865 48.09,65.865 49.275,67.05 Q106.B 53.45,67.05 TP_LED_AIGUA.1
LED_REG: J6.12 Q105.B TP_LED_REG.1 | length 48
  Top Layer w0.5: J6.12 46.43,57.68 48.667,59.917 55.417,59.917 TP_LED_REG.1
LEFT: J6.39 R112.1 SWLEFT.1 | length 69.6
  Top Layer w0.5: J6.39 5.04,75.46 4.207,76.293 4.207,80.365 12.892,89.05 44.2,89.05 52.125,81.125 55.575,81.125 R112.1@56.55,82.1 ; R112.1 R112.1@56.55,82.1 ; SWLEFT.1 57.25,80.075 57,80.325 56.95,80.325 56.55,80.725 R112.1@56.55,82.1
LV+in: J8.1 K101.12 K102.12 K103.12 K104.12 TP_LV+in.1 | length 18
  Top Layer w0.5: J8.1 J8.1@52.909,7.229 ; K103.12 76.7,26.7 TP_LV+in.1
MISO: J6.34 MISO.1 R119.1 U2.10 | length 43.4
  Top Layer w0.5: J6.34 6.74,62.76 5,64.5 5,64.998 6.503,66.501 10.037,66.501 10.038,66.5 11.25,66.5 12.25,67.5 MISO.1 ; v1(26.25,61.5) R119.1@27.2,61.5 ; R119.1 27.7,61.125 27.325,61.5 R119.1@27.2,61.5 ; U2.10 28.211,67.631 28.211,66.862 26.25,64.901 26.25,62.45 R119.1@27.2,61.5
  Bottom Layer w0.5: J6.34 8.201,61.559 16.711,61.559 16.751,61.6 26.15,61.6 v1(26.25,61.5)
MOSI: J6.33 MOSI.1 R118.1 U2.9 | length 26.9
  Top Layer w0.5: J6.33 8.201,61.421 14.454,61.421 15.364,60.511 MOSI.1 16.245,59.619 22.069,59.619 23.3,60.85 R118.1 23.55,61.25 24.45,61.25 24.75,61.55 24.75,64.5 26.941,66.691 26.941,67.631 U2.9
NetD101_A: D101.A R105.1 | length 2.7
  Top Layer w0.5: D101.A 45.069,61.94 45.95,62.82 R105.1
NetD101_K: D101.K Q105.C | length 2.3
  Top Layer w0.5: D101.K 45.317,60.124 45.925,60.124 46.675,60.875 Q105.C
NetD102_A: D102.A R106.1 | length 2.8
  Top Layer w0.5: D102.A 45.069,68.94 45.855,69.725 45.855,70.905 R106.1
NetD102_K: D102.K Q106.C | length 2.4
  Top Layer w0.5: D102.K 45.317,67.124 45.799,67.124 46.6,67.925 46.875,67.925 Q106.C
NetD103_A: D103.A R122.1 | length 2.7
  Top Layer w0.5: R122.1 83.146,65.3 83.596,65.75 D103.A
NetD104_K: D104.K K101.A1 Q101.E | length 7.8
  Top Layer w0.5: K101.A1 23.25,45.4 25.25,47.4 D104.K 25.375,47.625 25.375,49.925 25.45,50 Q101.E
NetD105_K: D105.K K102.A1 Q102.E | length 7.9
  Top Layer w0.5: K102.A1 40.25,45.15 D105.K 40.25,47.614 40.7,48.064 Q102.E
NetD106_K: D106.K K103.A1 Q103.E | length 8.2
  Top Layer w0.5: K103.A1 70.75,45.35 D106.K 70.75,50.1 70.85,50.2 70.85,50.475 70.925,50.55 Q103.E
NetD107_K: D107.K K104.A1 Q104.E | length 8.2
  Top Layer w0.5: K104.A1 55.25,45.325 D107.K 55.25,50.1 55.35,50.2 55.35,50.475 55.425,50.55 Q104.E
NetQ101_C: Q101.C R101.1 | length 2.9
  Top Layer w0.5: Q101.C 29.45,50.95 29.975,50.425 29.975,50.325 30.35,49.95 R101.1
NetQ102_C: Q102.C R102.1 | length 2.7
  Top Layer w0.5: Q102.C 44.45,51 44.975,50.475 44.975,50.325 45.35,49.95 R102.1
NetQ103_C: Q103.C R103.1 | length 2.6
  Top Layer w0.5: Q103.C 73.875,51.425 74.875,51.425 75.85,50.45 R103.1
NetQ104_C: Q104.C R104.1 | length 2.3
  Top Layer w0.5: Q104.C 58.375,51.425 60.275,51.425 R104.1
NetR107_3: R107.3 U1.3 | length 44
  Top Layer w0.5: R107.3 91.055,72.445 U1.3
NetR108_1: R108.1 U1.15 | length 37.7
  Top Layer w0.5: R108.1 85.65,41.75 122.512,41.75 122.727,41.965 U1.15
NTC_H: C101.2 J1.3 R116.1 TP_NTC_H.1 U2.1 | length 25.7
  Top Layer w0.5: U2.1 33.31,73.56 37.25,77.5 37.25,81.25 ; J1.3 34.767,82.916 34.767,81.983 35.5,81.25 37.25,81.25 ; C101.2@41.2,82 43.6,82 44.75,80.85 TP_NTC_H.1 ; C101.2 41,82.05 40.8,81.85 40.8,81.65 40.4,81.25 37.25,81.25
NTC_T: C102.2 J1.2 R117.1 TP_NTC_T.1 U2.2 | length 22.4
  Top Layer w0.5: C102.2 23.374,78 25.45,78 R117.1 29.974,77.95 30.79,77.134 ; J1.2 31.996,83.125 30.79,81.919 30.79,77.134 ; U2.2 U2.2@32.04,73 ; TP_NTC_T.1 32.5,75.229 32.04,74.769 U2.2@32.04,73 ; 30.79,77.134 30.79,74.25 U2.2@32.04,73
OK: J6.40 R110.1 SWOK.1 | length 72.3
  Top Layer w0.5: J6.40 7,81.937 13.513,88.45 43.617,88.45 53.392,78.675 60.925,78.675 SWOK.1 ; R110.1 56.55,84.35 58.75,82.15 58.75,80.925 SWOK.1@60.825,78.85
Persiana+: J3.8 K103.11 | length 18.4
  Bottom Layer w0.5: J3.8 71.187,10.437 76.4,15.65 K103.11
Persiana-: J3.7 K104.11 | length 14.6
  Bottom Layer w0.5: K104.11 60.925,14.758 J3.7
RELE1: J6.11 Q103.B TP_RELE1.1 | length 68.1
  Top Layer w0.5: J6.11 49.36,55.14 52.725,51.775 55.8,51.775 57.575,50 63.512,50 65.962,52.45 69.8,52.45 ; TP_RELE1.1 69.8,52.45 ; Q103.B 69.8,52.45
RELE2: J6.31 Q104.B TP_RELE2.1 | length 55.3
  Top Layer w0.5: J6.31 8.201,56.341 50.159,56.341 54.05,52.45 Q104.B 55.7,55.929 56.25,56.479 TP_RELE2.1
RELE3: J6.10 Q101.B TP_RELE3.1 | length 21.3
  Top Layer w0.5: J6.10 9.865,52.6 10.565,51.9 Q101.B@25.225,51.9 ; TP_RELE3.1 23.825,50.5 Q101.B@25.225,51.9 ; Q101.B Q101.B@25.225,51.9
RELE4: J6.30 Q102.B TP_RELE4.1 | length 39.7
  Top Layer w0.5: J6.30 8.201,53.801 31.189,53.801 33.04,51.95 Q102.B@40.425,51.95 ; TP_RELE4.1 38.975,50.5 Q102.B@40.425,51.95 ; Q102.B Q102.B@40.425,51.95
RIGHT: J6.18 R113.1 SWRIGHT.1 | length 81.5
  Top Layer w0.5: J6.18 10.895,74.275 20.946,74.275 24.721,70.5 42.25,70.5 44.5,72.75 51,72.75 58,65.75 66.25,65.75 70.625,70.125 SWRIGHT.1 70.625,74.9 71.475,75.75 71.475,81.95 R113.1
SCL: J6.4 J7.1 | length 30.5
  Bottom Layer w0.5: J6.4 16,30.9 J7.1
SDA: J6.24 J7.2 | length 36.8
  Top Layer w0.5: J6.24 3,33.36 3,15 5.75,12.25 10.75,12.25 J7.2
TRIG: J2.3 J6.9 TP_TRIG.1 | length 38.9
  Top Layer w0.5: J6.9 10.741,48.859 10.741,21.908 J2.3 13.109,19.27 14.089,20.25 TP_TRIG.1
UP: J6.20 R109.1 SWUP.1 | length 70.6
  Top Layer w0.5: J6.20 19.39,87.85 43.368,87.85 53.218,78 62.02,78 62.25,78.23 62.25,81.795 61.125,82.92 SWUP.1 61.35,84.35 61.5,84.5 61.55,84.5 62.55,85.5 62.55,86.125 R109.1
Ventilador: J4.1 K101.11 | length 16.8
  Top Layer w0.5: J4.1 30.75,9.57 K101.11
pads on no net: J1.9 J2.5 J3.9 J4. J5. J6.3 J6.7 J6.15 J6.16 J6.23 J6.27 J6.35 J6.36 J6.37 J7.0 J8. SWDOWN.2 SWDOWN.4 SWLEFT.2 SWLEFT.4 SWOK.2 SWOK.3 SWRIGHT.2 SWRIGHT.4 SWUP.2 SWUP.3 U1.S1 U1.S2 U1.S3 U1.S4 U2.5 U2.6
copper on no net: | length 431.4
  GND w0.254: 0,5 ccw(c5,5) 5,0 125,0 ccw(c125,5) 130,5 130,85 ccw(c125,85) 125,90 5,90 ccw(c5,85) 0,85 0,5